# EAGLE board Lineboard (EAGLE 9.6.2), part 1 of 2
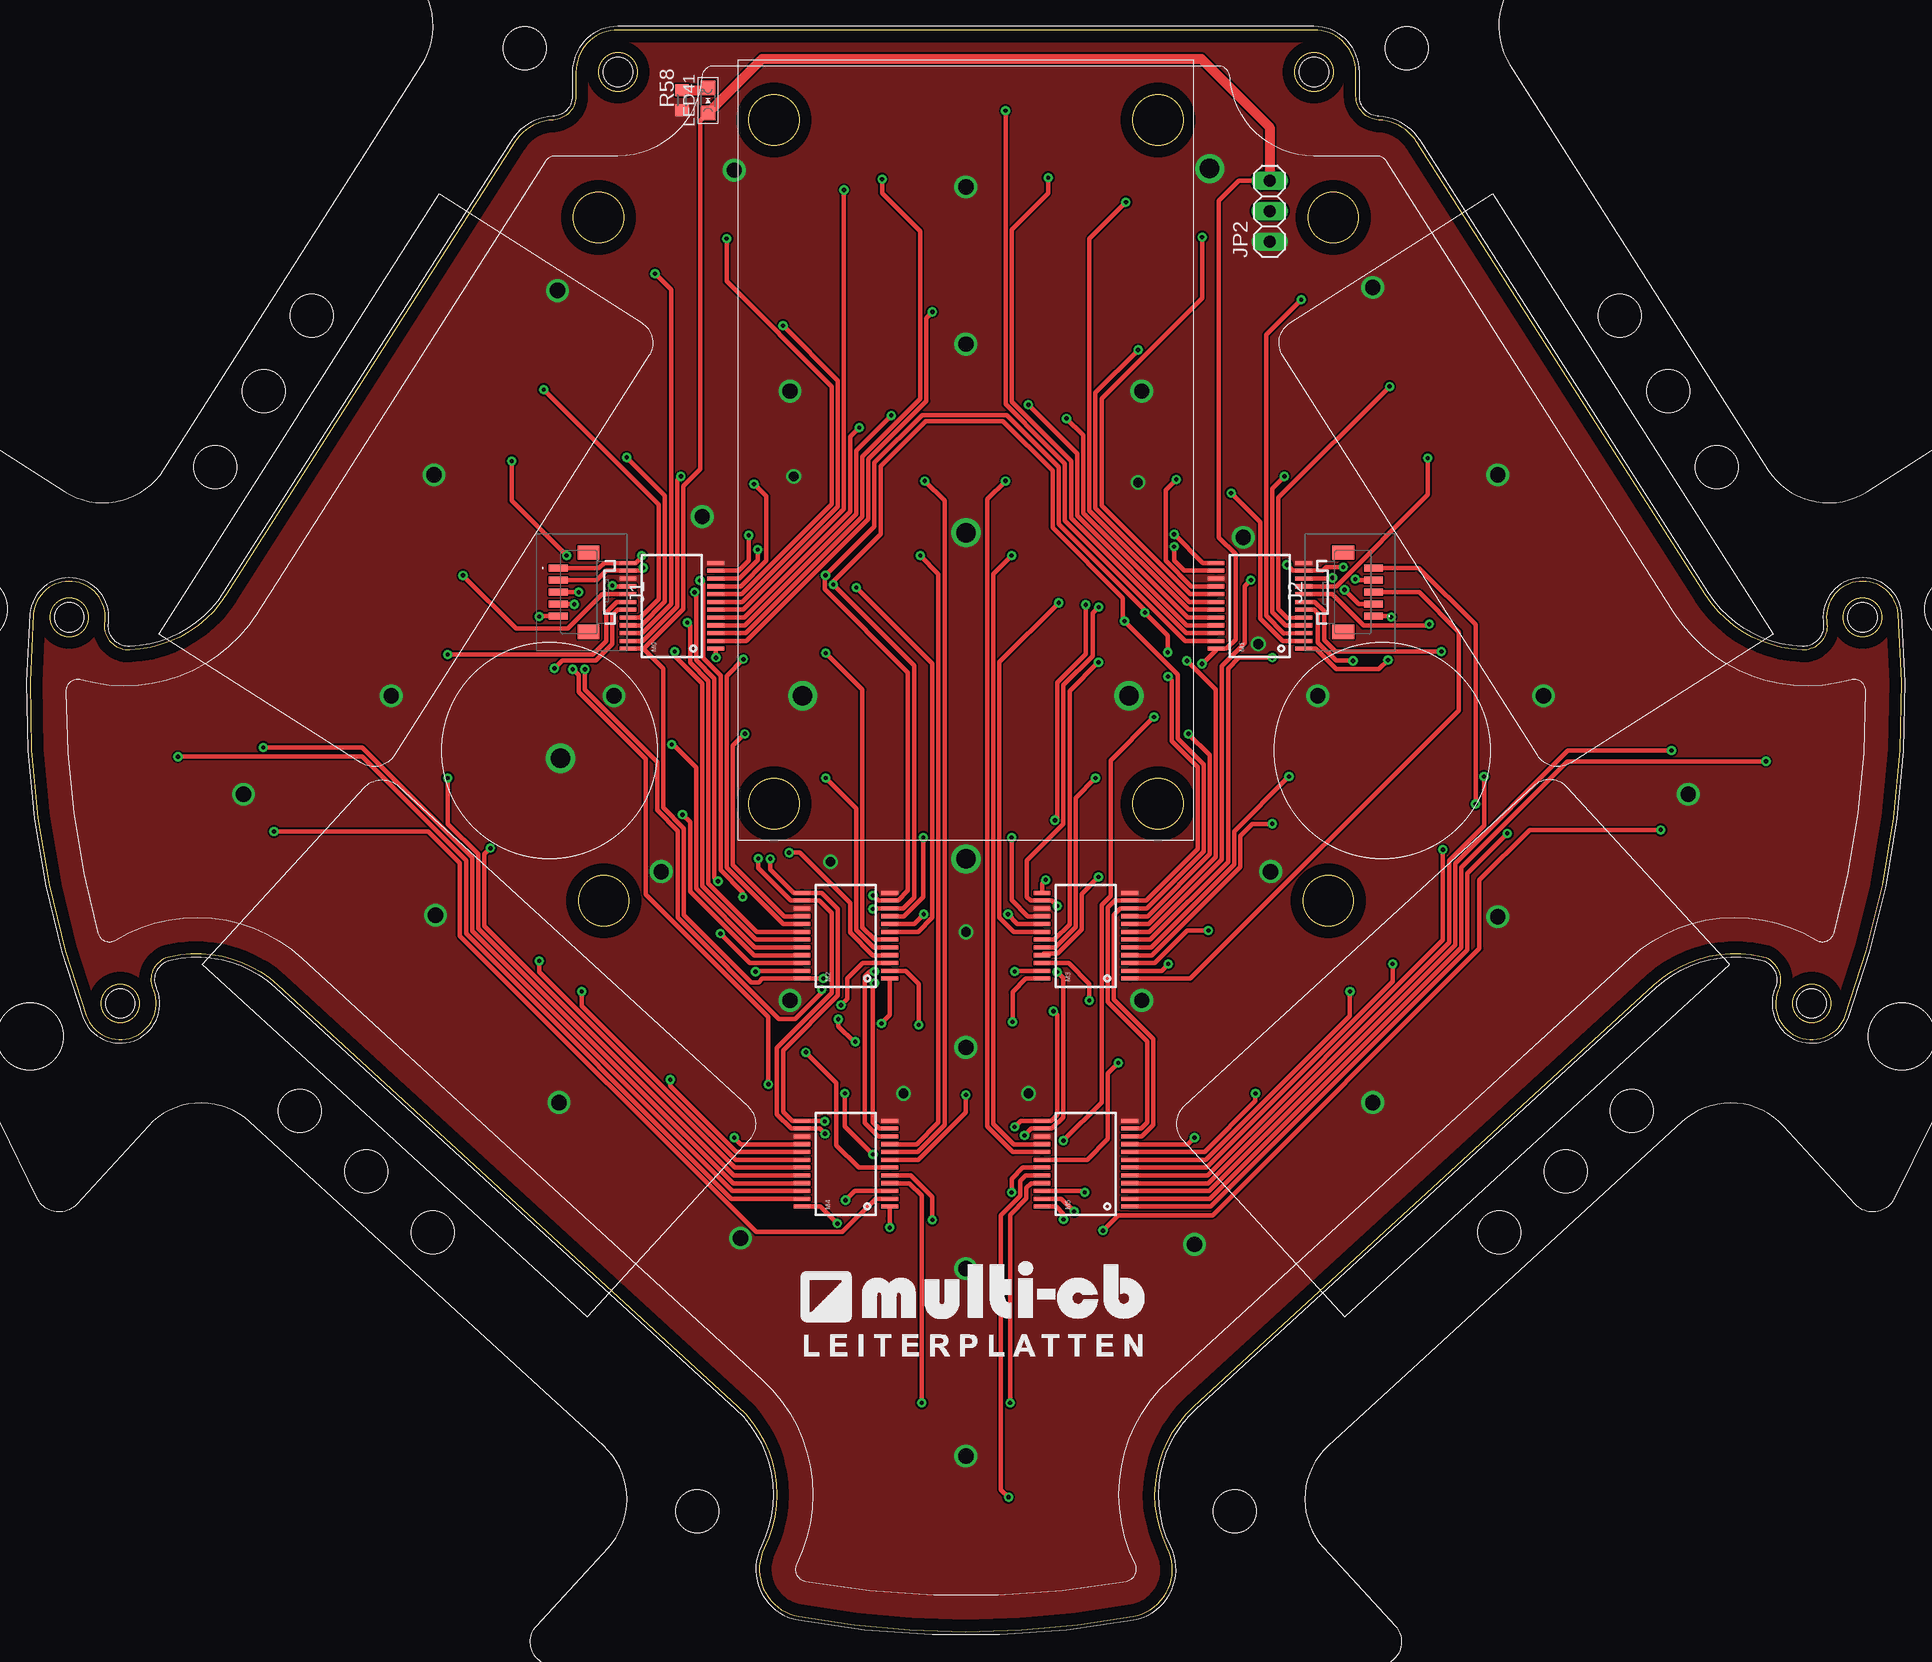
[diagram p0: board, top side]
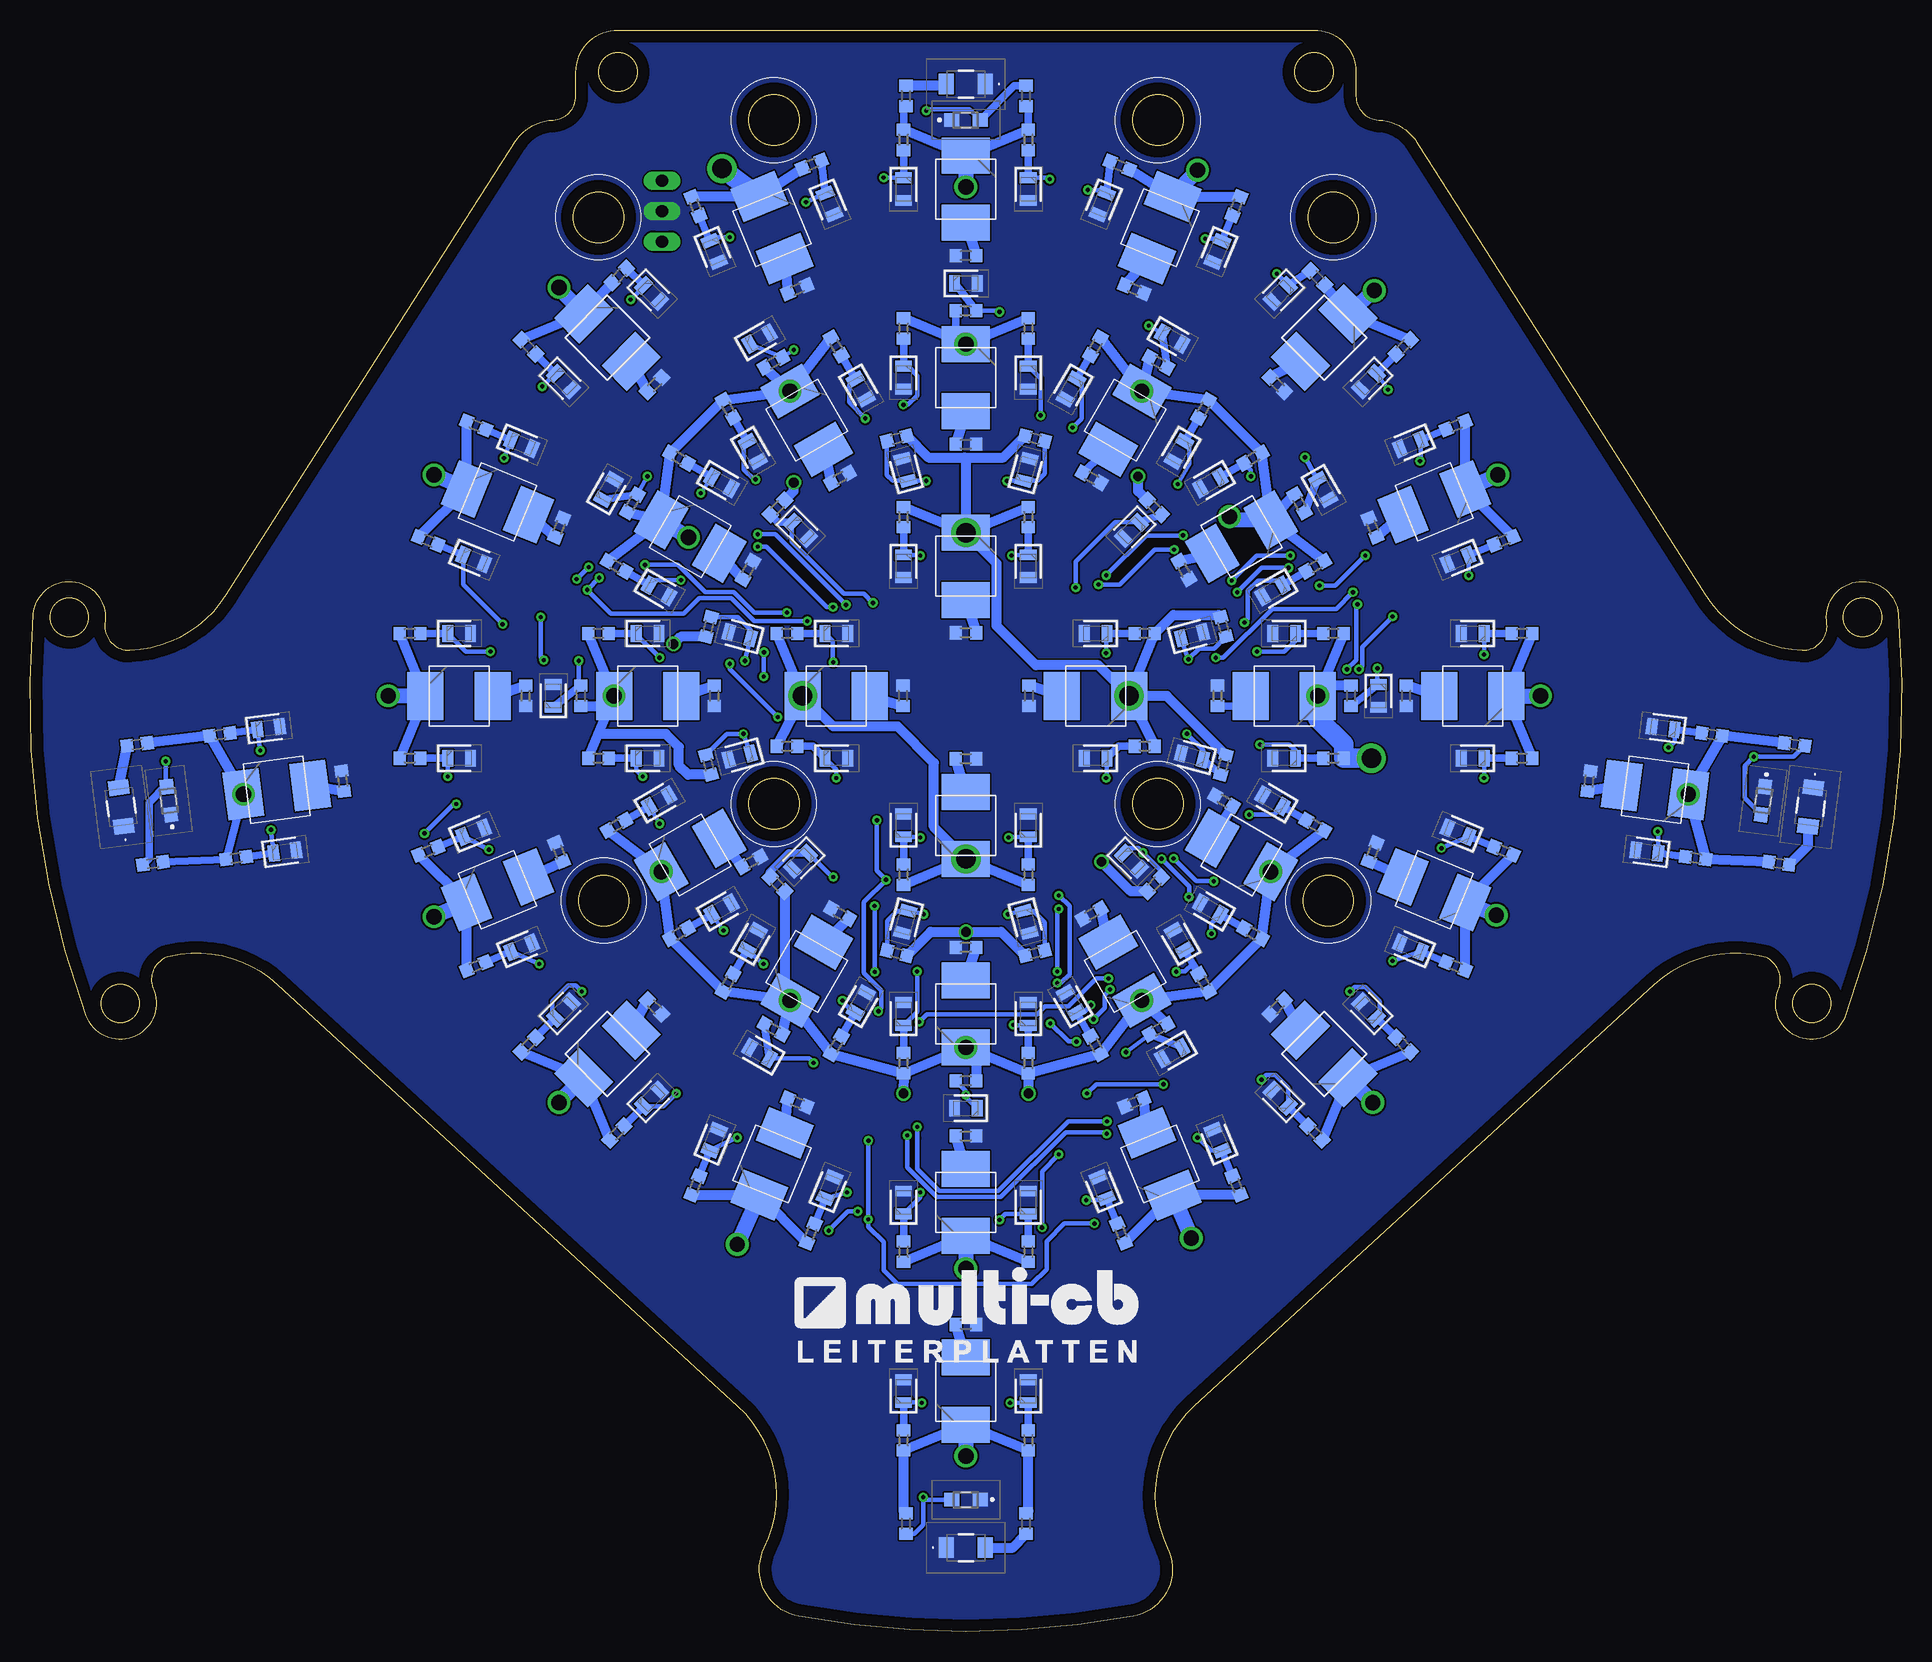
[diagram p1: board, bottom side, seen from below]

Size 155.98 x 133.5 mm. Coordinates in mm from the lower left corner, seen from the top.
Outline: 48.99,133.5 arc90 45.49,130 45.49,127.99 arc-87 43.59,126 arc55 40.4,124.15 16.37,86.43 arc-55 8.31,81.81 arc-97 6.24,83.97 arc0 6.27,84.28 arc180 0.29,84.8 arc25 4.7,51.32 arc180 10.33,53.38 arc0 10.23,53.66 arc-97 11.67,56.28 arc-55 20.65,53.91 58.99,18.78 arc-74 61.19,6.97 arc106 64.06,1.25 arc10 77.99,0 arc10 91.92,1.25 arc106 94.79,6.97 arc-74 96.99,18.78 135.33,53.91 arc-55 144.32,56.28 arc-97 145.75,53.66 arc0 145.65,53.38 arc180 151.29,51.32 arc25 155.69,84.8 arc180 149.72,84.28 arc0 149.74,83.97 arc-97 147.68,81.81 arc-55 139.61,86.43 115.58,124.15 arc55 112.4,126 arc-87 110.49,127.99 110.49,130 arc90 106.99,133.5 48.99,133.5
Outline: circle at 108.18,60.92 radius 2.1
Outline: circle at 108.61,117.88 radius 2.1
Outline: circle at 106.99,130 radius 1.6
Outline: circle at 148.47,52.35 radius 1.6
Outline: circle at 152.71,84.54 radius 1.6
Outline: circle at 93.99,69 radius 2.1
Outline: circle at 93.99,126 radius 2.1
Outline: circle at 61.99,126 radius 2.1
Outline: circle at 61.99,69 radius 2.1
Outline: circle at 3.28,84.54 radius 1.6
Outline: circle at 7.51,52.35 radius 1.6
Outline: circle at 48.99,130 radius 1.6
Outline: circle at 47.37,117.88 radius 2.1
Outline: circle at 47.81,60.92 radius 2.1
Copper layers (1*16): Top 0.035mm / dielectric 1.5mm / Bottom 0.035mm
Design rules "default": minimum track width 6mil, minimum drill 0.35mm, track to track 6mil, track to pad 6mil, pad to pad 6mil, via to via 6mil, smd to smd 6mil, copper to edge 40mil, drill to drill 6mil, minimum pad ring 10mil, minimum via ring 8mil, stop-mask expansion 4mil, vias tented up to drill 0mil, thermal gap 10mil
Net classes: 1 5v: width 0.813 mm, drill 0.8 mm

## Footprints (pad centres in the part's own frame; a part is rotated, then mirrored left to right if it is on the bottom)
2035600503 = smd 0.6 x 1.55: 1 2,2.348; 2 1,2.348; 3 0,2.348; 4 -1,2.348; 5 -2,2.348 | smd 1.2 x 1.8: MP1 3.3,-0.177; MP2 -3.3,-0.177
1X03 = drill 1.016 long: 1 -2.54,0; 2 0,0; 3 2.54,0
LED = smd 3 x 4: 123 2.8,0; 456 -2.8,0
SFH4656Z = smd 1.25 x 1.7: 1 -1.625,0; 2 1.625,0
POWER_DISTRIBUTION_CHIPLED_0805 = smd 1.2 x 1.2: A 0,-1.05; C 0,1.05
SPARKFUN_SSOP24 = smd 0.348 x 1.397: 1 -3.575,-3.656; 2 -2.925,-3.656; 3 -2.275,-3.656; 4 -1.625,-3.656; 5 -0.975,-3.656; 6 -0.325,-3.656; 7 0.325,-3.656; 8 0.975,-3.656; 9 1.625,-3.656; 10 2.275,-3.656; 11 2.925,-3.656; 12 3.575,-3.656; 13 3.575,3.656; 14 2.925,3.656; 15 2.275,3.656; 16 1.625,3.656; 17 0.975,3.656; 18 0.325,3.656; 19 -0.325,3.656; 20 -0.975,3.656; 21 -1.625,3.656; 22 -2.275,3.656; 23 -2.925,3.656; 24 -3.575,3.656
AP2012P3CP22 = smd 1.25 x 1.1: 1 -1.175,0; 2 1.175,0
R0603 = smd 1 x 1.1: 1 -0.85,0; 2 0.85,0
LEDC2012X89N = smd 0.9 x 1.4: 1 -0.95,0; 2 0.95,0

## Placement (x,y rotation side)
J1  5PIN_1MM_CON  [2035600503]  46.37,86.64 90 top
J2  5PIN_1MM_CON  [2035600503]  109.61,86.64 270 top
JP2  [1X03]  103.31,118.4 90 top
LED01  RND135-00056LEDD  [LED]  77.99,88.8 90 bottom
LED02  RND135-00056LEDD  [LED]  88.79,78 180 bottom
LED03  RND135-00056LEDD  [LED]  77.99,67.2 270 bottom
LED04  RND135-00056LEDD  [LED]  67.19,78 0 bottom
LED5  SFH_4656-Z  [SFH4656Z]  77.99,129 180 bottom
LED06  SFH_4656-Z  [SFH4656Z]  77.99,7 0 bottom
LED09  SFH_4656-Z  [SFH4656Z]  148.38,68.73 97.5 bottom
LED10  SFH_4656-Z  [SFH4656Z]  7.6,68.73 262.5 bottom
LED11  RND135-00056LEDD  [LED]  104.51,78 180 bottom
LED12  RND135-00056LEDD  [LED]  100.96,91.26 150 bottom
LED13  RND135-00056LEDD  [LED]  91.25,100.97 120 bottom
LED14  RND135-00056LEDD  [LED]  77.99,104.52 90 bottom
LED15  RND135-00056LEDD  [LED]  64.73,100.97 60 bottom
LED16  RND135-00056LEDD  [LED]  55.02,91.26 30 bottom
LED17  RND135-00056LEDD  [LED]  51.47,78 0 bottom
LED18  RND135-00056LEDD  [LED]  55.02,64.74 330 bottom
LED19  RND135-00056LEDD  [LED]  64.73,55.03 300 bottom
LED21  RND135-00056LEDD  [LED]  120.23,78 180 bottom
LED22  RND135-00056LEDD  [LED]  117.02,94.16 157.5 bottom
LED23  RND135-00056LEDD  [LED]  107.86,107.87 135 bottom
LED24  RND135-00056LEDD  [LED]  94.16,117.02 112.5 bottom
LED25  RND135-00056LEDD  [LED]  77.99,120.24 90 bottom
LED26  RND135-00056LEDD  [LED]  61.83,117.02 67.5 bottom
LED27  RND135-00056LEDD  [LED]  48.12,107.87 45 bottom
LED28  RND135-00056LEDD  [LED]  38.97,94.16 22.5 bottom
LED29  RND135-00056LEDD  [LED]  35.75,78 0 bottom
LED31  RND135-00056LEDD  [LED]  135.42,70.16 187.5 bottom
LED32  RND135-00056LEDD  [LED]  20.56,70.16 352.5 bottom
LED33  RND135-00056LEDD  [LED]  77.99,20.04 270 bottom
LED41  [POWER_DISTRIBUTION_CHIPLED_0805]  56.5,127.62 0 top
LED110  RND135-00056LEDD  [LED]  77.99,51.48 270 bottom
LED111  RND135-00056LEDD  [LED]  91.25,55.03 240 bottom
LED112  RND135-00056LEDD  [LED]  100.96,64.74 210 bottom
LED210  RND135-00056LEDD  [LED]  38.97,61.84 337.5 bottom
LED211  RND135-00056LEDD  [LED]  48.12,48.13 315 bottom
LED212  RND135-00056LEDD  [LED]  61.83,38.98 292.5 bottom
LED213  RND135-00056LEDD  [LED]  77.99,35.76 270 bottom
LED214  RND135-00056LEDD  [LED]  94.16,38.98 247.5 bottom
LED215  RND135-00056LEDD  [LED]  107.86,48.13 225 bottom
LED216  RND135-00056LEDD  [LED]  117.02,61.84 202.5 bottom
M0  MULTIPLEXER_MUX-74HC4067SMD  [SPARKFUN_SSOP24]  53.49,85.5 90 top
M1  MULTIPLEXER_MUX-74HC4067SMD  [SPARKFUN_SSOP24]  102.49,85.5 90 top
M2  MULTIPLEXER_MUX-74HC4067SMD  [SPARKFUN_SSOP24]  67.99,58 90 top
M3  MULTIPLEXER_MUX-74HC4067SMD  [SPARKFUN_SSOP24]  87.99,58 90 top
M4  MULTIPLEXER_MUX-74HC4067SMD  [SPARKFUN_SSOP24]  67.99,39 90 top
M5  MULTIPLEXER_MUX-74HC4067SMD  [SPARKFUN_SSOP24]  87.99,39 90 top
Q1  AP2012P3C-P22  [AP2012P3CP22]  77.99,11 180 bottom
Q2  AP2012P3C-P22  [AP2012P3CP22]  77.99,126 0 bottom
Q5  AP2012P3C-P22  [AP2012P3CP22]  144.42,69.25 97.5 bottom
Q6  AP2012P3C-P22  [AP2012P3CP22]  11.56,69.25 262.5 bottom
R01  120R  [R0603]  77.99,83.25 180 bottom
R02  120R  [R0603]  83.24,78 90 bottom
R03  120R  [R0603]  77.99,72.75 0 bottom
R04  120R  [R0603]  72.74,78 270 bottom
R05  120R  [R0603]  129.92,70.89 97.5 bottom
R06  120R  [R0603]  26.07,70.89 82.5 bottom
R07  120R  [R0603]  77.99,25.59 0 bottom
R08  10k  [R0603]  82.99,9 270 bottom
R09  1k  [R0603]  72.99,9 270 bottom
R11  120R  [R0603]  98.96,78 270 bottom
R12  120R  [R0603]  96.15,88.48 60 bottom
R13  120R  [R0603]  88.48,96.16 30 bottom
R14  120R  [R0603]  77.99,98.97 0 bottom
R15  120R  [R0603]  67.51,96.16 330 bottom
R16  120R  [R0603]  59.83,88.48 300 bottom
R17  120R  [R0603]  57.02,78 90 bottom
R18  120R  [R0603]  56.48,69.24 150 bottom
R19  120R  [R0603]  67.51,59.84 210 bottom
R21  120R  [R0603]  114.68,78 270 bottom
R22  120R  [R0603]  111.89,92.04 67.5 bottom
R23  120R  [R0603]  103.94,103.94 45 bottom
R24  120R  [R0603]  92.03,111.9 22.5 bottom
R25  120R  [R0603]  77.99,114.69 180 bottom
R26  120R  [R0603]  63.95,111.9 337.5 bottom
R27  120R  [R0603]  52.05,103.94 315 bottom
R28  120R  [R0603]  44.09,92.04 112.5 bottom
R29  120R  [R0603]  41.3,78 270 bottom
R32  10k  [R0603]  145.75,64.04 187.5 bottom
R33  1k  [R0603]  147.05,73.95 187.5 bottom
R34  10k  [R0603]  8.93,73.95 352.5 bottom
R35  1k  [R0603]  10.23,64.04 352.5 bottom
R42  10k  [R0603]  72.99,128 90 bottom
R43  1k  [R0603]  82.99,128 90 bottom
R58  1k  [R0603]  54.33,127.65 90 top
R110  120R  [R0603]  77.99,57.03 180 bottom
R111  120R  [R0603]  88.48,59.84 150 bottom
R112  120R  [R0603]  95.88,64.16 30 bottom
R210  120R  [R0603]  44.09,64.96 67.5 bottom
R211  120R  [R0603]  52.05,52.06 225 bottom
R212  120R  [R0603]  63.95,44.1 202.5 bottom
R213  120R  [R0603]  77.99,41.31 0 bottom
R214  120R  [R0603]  92.03,44.1 337.5 bottom
R215  120R  [R0603]  103.94,52.06 315 bottom
R216  120R  [R0603]  111.89,64.96 112.5 bottom
RP01  3k3  [R0603]  83.19,92.9 270 bottom
RP02  3k3  [R0603]  72.79,92.9 270 bottom
RP03  3k3  [R0603]  92.89,83.2 0 bottom
RP04  3k3  [R0603]  92.89,73.8 0 bottom
RP05  3k3  [R0603]  72.79,63.1 90 bottom
RP06  3k3  [R0603]  83.19,63.1 90 bottom
RP07  3k3  [R0603]  63.09,83.2 180 bottom
RP08  3k3  [R0603]  63.09,73.8 180 bottom
RP11  3k3  [R0603]  108.61,72.8 0 bottom
RP12  3k3  [R0603]  108.61,83.2 0 bottom
RP13  3k3  [R0603]  107.11,88.81 330 bottom
RP14  3k3  [R0603]  101.91,97.81 330 bottom
RP15  3k3  [R0603]  97.8,101.92 300 bottom
RP16  3k3  [R0603]  88.8,107.12 300 bottom
RP17  3k3  [R0603]  83.19,108.62 270 bottom
RP18  3k3  [R0603]  72.79,108.62 270 bottom
RP19  3k3  [R0603]  67.18,107.12 240 bottom
RP21  3k3  [R0603]  124.33,72.8 0 bottom
RP22  3k3  [R0603]  124.33,83.2 0 bottom
RP23  3k3  [R0603]  122.79,90.93 337.5 bottom
RP24  3k3  [R0603]  118.81,100.54 337.5 bottom
RP25  3k3  [R0603]  114.44,107.09 315 bottom
RP26  3k3  [R0603]  106.88,113.04 45 bottom
RP27  3k3  [R0603]  100.53,118.82 292.5 bottom
RP28  3k3  [R0603]  90.82,122.3 22.5 bottom
RP29  3k3  [R0603]  83.19,124.34 270 bottom
RP31  3k3  [R0603]  138.81,64.47 7.5 bottom
RP32  3k3  [R0603]  140.16,74.78 7.5 bottom
RP33  3k3  [R0603]  15.82,74.78 172.5 bottom
RP34  3k3  [R0603]  17.18,64.47 172.5 bottom
RP35  3k3  [R0603]  72.79,15.94 90 bottom
RP36  3k3  [R0603]  83.19,15.94 90 bottom
RP41  3k3  [R0603]  99.44,83.75 75 bottom
RP42  3k3  [R0603]  93.69,93.7 225 bottom
RP43  3k3  [R0603]  83.74,99.45 195 bottom
RP44  3k3  [R0603]  72.24,99.45 345 bottom
RP45  3k3  [R0603]  62.29,93.7 315 bottom
RP46  3k3  [R0603]  56.54,83.75 285 bottom
RP47  3k3  [R0603]  56.54,72.25 255 bottom
RP48  3k3  [R0603]  62.29,62.3 45 bottom
RP49  3k3  [R0603]  72.24,56.55 15 bottom
RP51  3k3  [R0603]  110.09,78 90 bottom
RP52  3k3  [R0603]  105.79,94.05 60 bottom
RP53  3k3  [R0603]  94.04,105.8 30 bottom
RP54  3k3  [R0603]  77.99,110.09 0 bottom
RP55  3k3  [R0603]  61.94,105.8 330 bottom
RP56  3k3  [R0603]  50.2,94.05 300 bottom
RP57  3k3  [R0603]  45.9,78 270 bottom
RP59  3k3  [R0603]  61.94,50.2 210 bottom
RP110  3k3  [R0603]  58.18,101.92 240 bottom
RP111  3k3  [R0603]  54.07,97.81 210 bottom
RP112  3k3  [R0603]  48.87,88.81 210 bottom
RP113  3k3  [R0603]  47.37,83.2 180 bottom
RP114  3k3  [R0603]  47.37,72.8 180 bottom
RP115  3k3  [R0603]  48.87,67.19 150 bottom
RP116  3k3  [R0603]  54.07,58.19 150 bottom
RP117  3k3  [R0603]  58.18,54.08 120 bottom
RP118  3k3  [R0603]  67.18,48.88 120 bottom
RP119  3k3  [R0603]  72.79,47.38 90 bottom
RP120  3k3  [R0603]  83.19,47.38 90 bottom
RP121  3k3  [R0603]  88.8,48.88 60 bottom
RP122  3k3  [R0603]  97.8,54.08 60 bottom
RP123  3k3  [R0603]  101.91,58.19 30 bottom
RP124  3k3  [R0603]  107.11,67.19 30 bottom
RP210  3k3  [R0603]  72.79,124.34 270 bottom
RP211  3k3  [R0603]  65.16,122.2 157.5 bottom
RP212  3k3  [R0603]  55.45,118.82 247.5 bottom
RP213  3k3  [R0603]  48.7,112.84 135 bottom
RP214  3k3  [R0603]  41.55,107.09 225 bottom
RP215  3k3  [R0603]  37.17,100.54 202.5 bottom
RP216  3k3  [R0603]  33.19,90.93 202.5 bottom
RP217  3k3  [R0603]  31.65,83.2 180 bottom
RP218  3k3  [R0603]  31.65,72.8 180 bottom
RP219  3k3  [R0603]  33.19,65.07 157.5 bottom
RP220  3k3  [R0603]  37.17,55.46 157.5 bottom
RP221  3k3  [R0603]  41.55,48.91 135 bottom
RP222  3k3  [R0603]  48.9,41.56 135 bottom
RP223  3k3  [R0603]  55.45,37.18 112.5 bottom
RP224  3k3  [R0603]  65.06,33.2 112.5 bottom
RP225  3k3  [R0603]  72.79,31.66 90 bottom
RP226  3k3  [R0603]  83.19,31.66 90 bottom
RP227  3k3  [R0603]  90.92,33.2 67.5 bottom
RP228  3k3  [R0603]  100.53,37.18 67.5 bottom
RP229  3k3  [R0603]  107.08,41.56 45 bottom
RP230  3k3  [R0603]  114.44,48.91 45 bottom
RP231  3k3  [R0603]  118.81,55.46 22.5 bottom
RP232  3k3  [R0603]  122.79,65.07 22.5 bottom
RP410  3k3  [R0603]  83.74,56.55 165 bottom
RP411  3k3  [R0603]  93.69,62.3 135 bottom
RP412  3k3  [R0603]  99.44,72.25 105 bottom
RP510  3k3  [R0603]  77.99,45.91 180 bottom
RP511  3k3  [R0603]  94.04,50.2 150 bottom
SFH01  [LEDC2012X89N]  83.19,88.8 270 bottom
SFH02  [LEDC2012X89N]  72.79,88.8 270 bottom
SFH03  [LEDC2012X89N]  88.79,83.2 0 bottom
SFH04  [LEDC2012X89N]  88.79,72.8 0 bottom
SFH05  [LEDC2012X89N]  72.79,67.2 90 bottom
SFH06  [LEDC2012X89N]  83.19,67.2 90 bottom
SFH07  [LEDC2012X89N]  67.19,83.2 180 bottom
SFH08  [LEDC2012X89N]  67.19,72.8 180 bottom
SFH11  [LEDC2012X89N]  104.51,72.8 0 bottom
SFH12  [LEDC2012X89N]  104.51,83.2 0 bottom
SFH13  [LEDC2012X89N]  103.56,86.76 330 bottom
SFH14  [LEDC2012X89N]  98.36,95.76 330 bottom
SFH15  [LEDC2012X89N]  95.75,98.37 300 bottom
SFH16  [LEDC2012X89N]  86.75,103.57 300 bottom
SFH17  [LEDC2012X89N]  83.19,104.52 270 bottom
SFH18  [LEDC2012X89N]  72.79,104.52 270 bottom
SFH19  [LEDC2012X89N]  69.23,103.57 240 bottom
SFH21  [LEDC2012X89N]  120.23,72.8 0 bottom
SFH22  [LEDC2012X89N]  120.23,83.2 0 bottom
SFH23  [LEDC2012X89N]  119.01,89.36 337.5 bottom
SFH24  [LEDC2012X89N]  115.03,98.97 337.5 bottom
SFH25  [LEDC2012X89N]  111.54,104.19 315 bottom
SFH26  [LEDC2012X89N]  104.18,111.55 315 bottom
SFH27  [LEDC2012X89N]  98.96,115.03 292.5 bottom
SFH28  [LEDC2012X89N]  89.35,119.02 292.5 bottom
SFH29  [LEDC2012X89N]  83.19,120.24 270 bottom
SFH31  [LEDC2012X89N]  134.74,65.01 7.5 bottom
SFH32  [LEDC2012X89N]  136.1,75.32 7.5 bottom
SFH33  [LEDC2012X89N]  19.89,75.32 172.5 bottom
SFH34  [LEDC2012X89N]  21.24,65.01 172.5 bottom
SFH35  [LEDC2012X89N]  72.79,20.04 90 bottom
SFH36  [LEDC2012X89N]  83.19,20.04 90 bottom
SFH41  [LEDC2012X89N]  96.83,83.05 165 bottom
SFH42  [LEDC2012X89N]  91.78,91.79 315 bottom
SFH43  [LEDC2012X89N]  83.04,96.84 105 bottom
SFH44  [LEDC2012X89N]  72.94,96.84 75 bottom
SFH45  [LEDC2012X89N]  64.2,91.79 225 bottom
SFH46  [LEDC2012X89N]  59.15,83.05 15 bottom
SFH47  [LEDC2012X89N]  59.15,72.95 165 bottom
SFH48  [LEDC2012X89N]  64.2,64.21 315 bottom
SFH49  [LEDC2012X89N]  72.94,59.16 285 bottom
SFH51  [LEDC2012X89N]  112.37,78 90 bottom
SFH52  [LEDC2012X89N]  107.77,95.19 60 bottom
SFH53  [LEDC2012X89N]  95.18,107.77 30 bottom
SFH54  [LEDC2012X89N]  77.99,112.38 0 bottom
SFH55  [LEDC2012X89N]  60.8,107.77 330 bottom
SFH56  [LEDC2012X89N]  48.22,95.19 300 bottom
SFH57  [LEDC2012X89N]  43.61,78 270 bottom
SFH59  [LEDC2012X89N]  60.8,48.23 210 bottom
SFH110  [LEDC2012X89N]  60.23,98.37 240 bottom
SFH111  [LEDC2012X89N]  57.62,95.76 210 bottom
SFH112  [LEDC2012X89N]  52.42,86.76 210 bottom
SFH113  [LEDC2012X89N]  51.47,83.2 180 bottom
SFH114  [LEDC2012X89N]  51.47,72.8 180 bottom
SFH115  [LEDC2012X89N]  52.42,69.24 150 bottom
SFH116  [LEDC2012X89N]  57.62,60.24 150 bottom
SFH117  [LEDC2012X89N]  60.23,57.63 120 bottom
SFH118  [LEDC2012X89N]  69.23,52.43 120 bottom
SFH119  [LEDC2012X89N]  72.79,51.48 90 bottom
SFH120  [LEDC2012X89N]  83.19,51.48 90 bottom
SFH121  [LEDC2012X89N]  86.75,52.43 60 bottom
SFH122  [LEDC2012X89N]  95.75,57.63 60 bottom
SFH123  [LEDC2012X89N]  98.36,60.24 30 bottom
SFH124  [LEDC2012X89N]  103.56,69.24 30 bottom
SFH210  [LEDC2012X89N]  72.79,120.24 270 bottom
SFH211  [LEDC2012X89N]  66.63,119.02 247.5 bottom
SFH212  [LEDC2012X89N]  57.02,115.03 247.5 bottom
SFH213  [LEDC2012X89N]  51.8,111.55 225 bottom
SFH214  [LEDC2012X89N]  44.45,104.19 225 bottom
SFH215  [LEDC2012X89N]  40.96,98.97 202.5 bottom
SFH216  [LEDC2012X89N]  36.98,89.36 202.5 bottom
SFH217  [LEDC2012X89N]  35.75,83.2 180 bottom
SFH218  [LEDC2012X89N]  35.75,72.8 180 bottom
SFH219  [LEDC2012X89N]  36.98,66.64 157.5 bottom
SFH220  [LEDC2012X89N]  40.96,57.03 157.5 bottom
SFH221  [LEDC2012X89N]  44.45,51.81 135 bottom
SFH222  [LEDC2012X89N]  51.8,44.45 135 bottom
SFH223  [LEDC2012X89N]  57.02,40.97 112.5 bottom
SFH224  [LEDC2012X89N]  66.63,36.98 112.5 bottom
SFH225  [LEDC2012X89N]  72.79,35.76 90 bottom
SFH226  [LEDC2012X89N]  83.19,35.76 90 bottom
SFH227  [LEDC2012X89N]  89.35,36.98 67.5 bottom
SFH228  [LEDC2012X89N]  98.96,40.97 67.5 bottom
SFH229  [LEDC2012X89N]  104.18,44.45 45 bottom
SFH230  [LEDC2012X89N]  111.54,51.81 45 bottom
SFH231  [LEDC2012X89N]  115.03,57.03 22.5 bottom
SFH232  [LEDC2012X89N]  119.01,66.64 22.5 bottom
SFH410  [LEDC2012X89N]  83.04,59.16 255 bottom
SFH411  [LEDC2012X89N]  91.78,64.21 225 bottom
SFH412  [LEDC2012X89N]  96.83,72.95 195 bottom
SFH510  [LEDC2012X89N]  77.99,43.62 180 bottom
SFH511  [LEDC2012X89N]  95.18,48.23 150 bottom
U$1  MULTICB_LOGOSTANDART  [SMALL_STANDARTLOGO_28MM]  63.01,22.12 0 top
U$5  MULTICB_LOGOSTANDART  [SMALL_STANDARTLOGO_28MM]  93.49,21.61 0 bottom

## Library data of the parts
J1 J2 = 5PinConnector; DESCRIPTION: Headers & Wire Housings PicoClasp Hdr SMT SR Vrt 5Ckt OPL Au0.38; HEIGHT: 5.61mm; MANUFACTURER_NAME: Molex; MANUFACTURER_PART_NUMBER: 203560-0503; MOUSER_PART_NUMBER: 538-203560-0503; MOUSER_PRICE-STOCK: https://www.mouser.co.uk/ProductDetail/Molex/203560-0503?qs=F5EMLAvA7IDMlfZodDQB8w%3D%3D
JP2 = pinhead
LED01-LED04 LED11-LED19 LED21-LED29 LED31-LED33 LED110-LED112 LED210-LED216 = RND_135-00056
LED5 LED06 LED09 LED10 = SFH_4656-Z; DESCRIPTION: Infrared Emitters - High Power 850 nm MIDLED; HEIGHT: 1.7mm; MANUFACTURER_NAME: OSRAM; MANUFACTURER_PART_NUMBER: SFH 4656-Z; MOUSER_PART_NUMBER: 720-SFH4656-Z; MOUSER_PRICE-STOCK: http://www.mouser.com/Search/ProductDetail.aspx?qs=KeLXQb9Uup2X3iF4LUEobw%3d%3d
LED41 = Open24; MF: Würth Elektronik; MPN: 150080GS75000
M0 M1-M5 = Open24
Q1 Q2 Q5 Q6 = AP2012P3C-P22; ARROW_PART_NUMBER: AP2012P3C-P22; ARROW_PRICE-STOCK: https://www.arrow.com/en/products/ap2012p3c-p22/kingbright; DESCRIPTION: Phototransistors 2x1.2mm PHOTOTRANS SMD LED; HEIGHT: 1.1mm; MANUFACTURER_NAME: Kingbright; MANUFACTURER_PART_NUMBER: AP2012P3C-P22; MOUSER_PART_NUMBER: 604-AP2012P3C-P22; MOUSER_PRICE-STOCK: https://www.mouser.com/Search/Refine.aspx?Keyword=604-AP2012P3C-P22
R01-R09 R11-R19 R21-R29 R32-R35 R42 R43 R58 R110-R112 R210-R216 RP01-RP08 RP11-RP19 RP21-RP29 RP31-RP36 RP41-RP49 RP51-RP57 RP59 RP110-RP124 RP210-RP232 RP410-RP412 RP510 RP511 = rcl; SPICEPREFIX: R
SFH01-SFH08 SFH11-SFH19 SFH21-SFH29 SFH31-SFH36 SFH41-SFH49 SFH51-SFH57 SFH59 SFH110-SFH124 SFH210-SFH232 SFH410-SFH412 SFH510 SFH511 = SamacSys_Parts; DESCRIPTION: Osram Opto SFH 3716 Ambient Light Sensor Unit Surface Mount 2-Pin; HEIGHT: 0.89mm; MANUFACTURER_NAME: OSRAM Opto Semiconductors; MANUFACTURER_PART_NUMBER: SFH 3716; MOUSER_PART_NUMBER: 720-SFH3716; MOUSER_PRICE-STOCK: https://www.mouser.com/Search/Refine.aspx?Keyword=720-SFH3716; RS_PART_NUMBER: 1115952P; RS_PRICE-STOCK: http://uk.rs-online.com/web/p/products/1115952P
U$1 U$5 = MultiCB_logos

## Nets
01: M5.16 RP01.2 SFH01.1
02: M4.9 RP02.2 SFH02.1
03: M3.19 RP03.2 SFH03.1
04: M3.20 RP04.2 SFH04.1
05: M2.9 RP05.2 SFH05.1
06: M3.16 RP06.2 SFH06.1
07: M2.6 RP07.2 SFH07.1
08: M2.5 RP08.2 SFH08.1
11: M3.5 RP11.2 SFH11.1
12: M3.6 RP12.2 SFH12.1
13: M3.7 RP13.2 SFH13.1
14: M1.2 RP14.2 SFH14.1
15: M1.16 RP15.2 SFH15.1
16: M1.20 RP16.2 SFH16.1
17: M1.21 RP17.2 SFH17.1
18: M0.4 RP18.2 SFH18.1
19: M0.5 RP19.2 SFH19.1
21: M5.4 RP21.2 SFH21.1
22: M1.7 RP22.2 SFH22.1
23: M1.8 RP23.2 SFH23.1
24: M1.9 RP24.2 SFH24.1
25: M1.5 RP25.2 SFH25.1
26: M1.3 RP26.2 SFH26.1
27: M1.17 RP27.2 SFH27.1
28: M1.19 RP28.2 SFH28.1
29: M1.22 RP29.2 SFH29.1
31: M5.23 RP31.2 SFH31.1
32: M5.3 RP32.2 SFH32.1
33: M4.22 RP33.2 SFH33.1
34: M4.2 RP34.2 SFH34.1
35: M4.4 RP35.2 SFH35.1
36: M5.21 RP36.2 SFH36.1
41: M3.8 RP41.2 SFH41.1
42: M3.18 RP42.2 SFH42.1
43: M5.17 RP43.2 SFH43.1
44: M4.8 RP44.2 SFH44.1
45: M2.7 RP45.2 SFH45.1
46: M2.17 RP46.2 SFH46.1
47: M2.16 RP47.2 SFH47.1
48: M2.4 RP48.2 SFH48.1
49: M2.8 RP49.2 SFH49.1
51: M1.6 RP51.2 SFH51.1
52: M1.4 RP52.2 SFH52.1
53: M1.18 RP53.2 SFH53.1
54: M0.2 RP54.2 SFH54.1
55: M0.7 RP55.2 SFH55.1
56: M0.21 RP56.2 SFH56.1
57: M0.19 RP57.2 SFH57.1
59: M4.6 RP59.2 SFH59.1
110: M0.9 RP110.2 SFH110.1
111: M0.23 RP111.2 SFH111.1
112: M2.18 RP112.2 SFH112.1
113: M2.19 RP113.2 SFH113.1
114: M2.20 RP114.2 SFH114.1
115: M2.21 RP115.2 SFH115.1
116: M2.22 RP116.2 SFH116.1
117: M2.23 RP117.2 SFH117.1
118: M2.3 RP118.2 SFH118.1
119: M2.2 RP119.2 SFH119.1
120: M3.23 RP120.2 SFH120.1
121: M3.22 RP121.2 SFH121.1
122: M3.2 RP122.2 SFH122.1
123: M3.3 RP123.2 SFH123.1
124: M3.4 RP124.2 SFH124.1
210: M0.3 RP210.2 SFH210.1
211: M0.6 RP211.2 SFH211.1
212: M0.8 RP212.2 SFH212.1
213: M0.22 RP213.2 SFH213.1
214: M0.20 RP214.2 SFH214.1
215: M0.16 RP215.2 SFH215.1
216: M0.17 RP216.2 SFH216.1
217: M0.18 RP217.2 SFH217.1
218: M4.21 RP218.2 SFH218.1
219: M4.20 RP219.2 SFH219.1
220: M4.19 RP220.2 SFH220.1
221: M4.18 RP221.2 SFH221.1
222: M4.17 RP222.2 SFH222.1
223: M4.16 RP223.2 SFH223.1
224: M4.3 RP224.2 SFH224.1
225: M4.5 RP225.2 SFH225.1
226: M5.19 RP226.2 SFH226.1
227: M5.22 RP227.2 SFH227.1
228: M5.9 RP228.2 SFH228.1
229: M5.8 RP229.2 SFH229.1
230: M5.7 RP230.2 SFH230.1
231: M5.6 RP231.2 SFH231.1
232: M5.5 RP232.2 SFH232.1
410: M3.17 RP410.2 SFH410.1
411: M3.21 RP411.2 SFH411.1
412: M3.9 RP412.2 SFH412.1
510: M4.7 RP510.2 SFH510.1
511: M5.18 RP511.2 SFH511.1
+3V3: JP2.2 LED5.1 LED06.1 LED09.1 LED10.1 Q1.1 Q2.1 Q5.1 Q6.1 R01.2 R02.2 R03.2 R04.2 R05.2 R06.2 R07.2 R11.2 R12.2 R13.2 R14.2 R15.2 R16.2 R17.2 R18.2 R19.2 R21.2 R22.2 R23.2 R24.2 R25.2 R26.2 R27.2 R28.2 R29.2 R110.2 R111.2 R112.2 R210.2 R211.2 R212.2 R213.2 R214.2 R215.2 R216.2 SFH01.2 SFH02.2 SFH03.2 SFH04.2 SFH05.2 SFH06.2 SFH07.2 SFH08.2 SFH11.2 SFH12.2 SFH13.2 SFH14.2 SFH15.2 SFH16.2 SFH17.2 SFH18.2 SFH19.2 SFH21.2 SFH22.2 SFH23.2 SFH24.2 SFH25.2 SFH26.2 SFH27.2 SFH28.2 SFH29.2 SFH31.2 SFH32.2 SFH33.2 SFH34.2 SFH35.2 SFH36.2 SFH41.2 SFH42.2 SFH43.2 SFH44.2 SFH45.2 SFH46.2 SFH47.2 SFH48.2 SFH49.2 SFH51.2 SFH52.2 SFH53.2 SFH54.2 SFH55.2 SFH56.2 SFH57.2 SFH59.2 SFH110.2 SFH111.2 SFH112.2 SFH113.2 SFH114.2 SFH115.2 SFH116.2 SFH117.2 SFH118.2 SFH119.2 SFH120.2 SFH121.2 SFH122.2 SFH123.2 SFH124.2 SFH210.2 SFH211.2 SFH212.2 SFH213.2 SFH214.2 SFH215.2 SFH216.2 SFH217.2 SFH218.2 SFH219.2 SFH220.2 SFH221.2 SFH222.2 SFH223.2 SFH224.2 SFH225.2 SFH226.2 SFH227.2 SFH228.2 SFH229.2 SFH230.2 SFH231.2 SFH232.2 SFH410.2 SFH411.2 SFH412.2 SFH510.2 SFH511.2
+5V: JP2.3 LED41.A M0.24 M1.24 M2.24 M3.24 M4.24 M5.24
GND: JP2.1 LED01.123 LED02.123 LED03.123 LED04.123 LED11.123 LED12.123 LED13.123 LED14.123 LED15.123 LED16.123 LED17.123 LED18.123 LED19.123 LED21.123 LED22.123 LED23.123 LED24.123 LED25.123 LED26.123 LED27.123 LED28.123 LED29.123 LED31.123 LED32.123 LED33.123 LED110.123 LED111.123 LED112.123 LED210.123 LED211.123 LED212.123 LED213.123 LED214.123 LED215.123 LED216.123 M0.12 M0.15 M1.12 M1.15 M2.12 M2.15 M3.12 M3.15 M4.12 M4.15 M5.12 M5.15 R08.1 R09.1 R32.1 R33.1 R34.1 R35.1 R42.1 R43.1 R58.1 RP01.1 RP02.1 RP03.1 RP04.1 RP05.1 RP06.1 RP07.1 RP08.1 RP11.1 RP12.1 RP13.1 RP14.1 RP15.1 RP16.1 RP17.1 RP18.1 RP19.1 RP21.1 RP22.1 RP23.1 RP24.1 RP25.1 RP26.1 RP27.1 RP28.1 RP29.1 RP31.1 RP32.1 RP33.1 RP34.1 RP35.1 RP36.1 RP41.1 RP42.1 RP43.1 RP44.1 RP45.1 RP46.1 RP47.1 RP48.1 RP49.1 RP51.1 RP52.1 RP53.1 RP54.1 RP55.1 RP56.1 RP57.1 RP59.1 RP110.1 RP111.1 RP112.1 RP113.1 RP114.1 RP115.1 RP116.1 RP117.1 RP118.1 RP119.1 RP120.1 RP121.1 RP122.1 RP123.1 RP124.1 RP210.1 RP211.1 RP212.1 RP213.1 RP214.1 RP215.1 RP216.1 RP217.1 RP218.1 RP219.1 RP220.1 RP221.1 RP222.1 RP223.1 RP224.1 RP225.1 RP226.1 RP227.1 RP228.1 RP229.1 RP230.1 RP231.1 RP232.1 RP410.1 RP411.1 RP412.1 RP510.1 RP511.1
IR1: M1.23 Q2.2 R42.2
IR2: M5.20 Q1.2 R08.2
IR3: M5.2 Q5.2 R32.2
IR4: M4.23 Q6.2 R34.2
N$1: LED11.456 R11.1
N$2: LED12.456 R12.1
N$3: LED13.456 R13.1
N$4: LED14.456 R14.1
N$5: LED15.456 R15.1
N$6: LED16.456 R16.1
N$7: LED17.456 R17.1
N$8: LED18.456 R18.1
N$9: LED19.456 R19.1
N$10: LED110.456 R110.1
N$11: LED111.456 R111.1
N$12: LED112.456 R112.1
N$13: LED21.456 R21.1
N$14: LED22.456 R22.1
N$15: LED23.456 R23.1
N$16: LED24.456 R24.1
N$17: LED25.456 R25.1
N$18: LED26.456 R26.1
N$19: LED27.456 R27.1
N$20: LED28.456 R28.1
N$21: LED01.456 R01.1
N$22: LED02.456 R02.1
N$23: LED03.456 R03.1
N$24: LED04.456 R04.1
N$25: LED29.456 R29.1
N$26: LED210.456 R210.1
N$27: LED211.456 R211.1
N$28: LED212.456 R212.1
N$29: LED213.456 R213.1
N$30: LED214.456 R214.1
N$31: LED215.456 R215.1
N$32: LED216.456 R216.1
N$33: LED31.456 R05.1
N$34: LED32.456 R06.1
N$35: LED33.456 R07.1
N$36: LED06.2 R09.2
N$37: LED5.2 R43.2
N$40: LED09.2 R33.2
N$41: LED10.2 R35.2
N$45: LED41.C R58.2
S0: J2.2 M0.10 M1.10 M2.10 M3.10 M4.10 M5.10
S1: J2.4 M0.11 M1.11 M2.11 M3.11 M4.11 M5.11
S2: J1.2 M0.14 M1.14 M2.14 M3.14 M4.14 M5.14
S3: J1.1 M0.13 M1.13 M2.13 M3.13 M4.13 M5.13
SIGNAL_OUT_0: J1.3 M0.1
SIGNAL_OUT_1: J2.1 M1.1
SIGNAL_OUT_2: J1.4 M2.1
SIGNAL_OUT_3: J2.3 M3.1
SIGNAL_OUT_4: J1.5 M4.1
SIGNAL_OUT_5: J2.5 M5.1